# Altium PCB BCK_REVA.PcbDoc (part 2 of 2)
Units mm, origin at the board's own origin, x right, y up, seen from the top; angles counter-clockwise.
Board outline 99.5 x 146.8 mm, 4 copper layers (Top Layer, Plane (MIXED), Plane (GND), Bottom Layer), stack 1.586 mm thick; 27 components, 72 nets, 792 pads, 1035 vias.
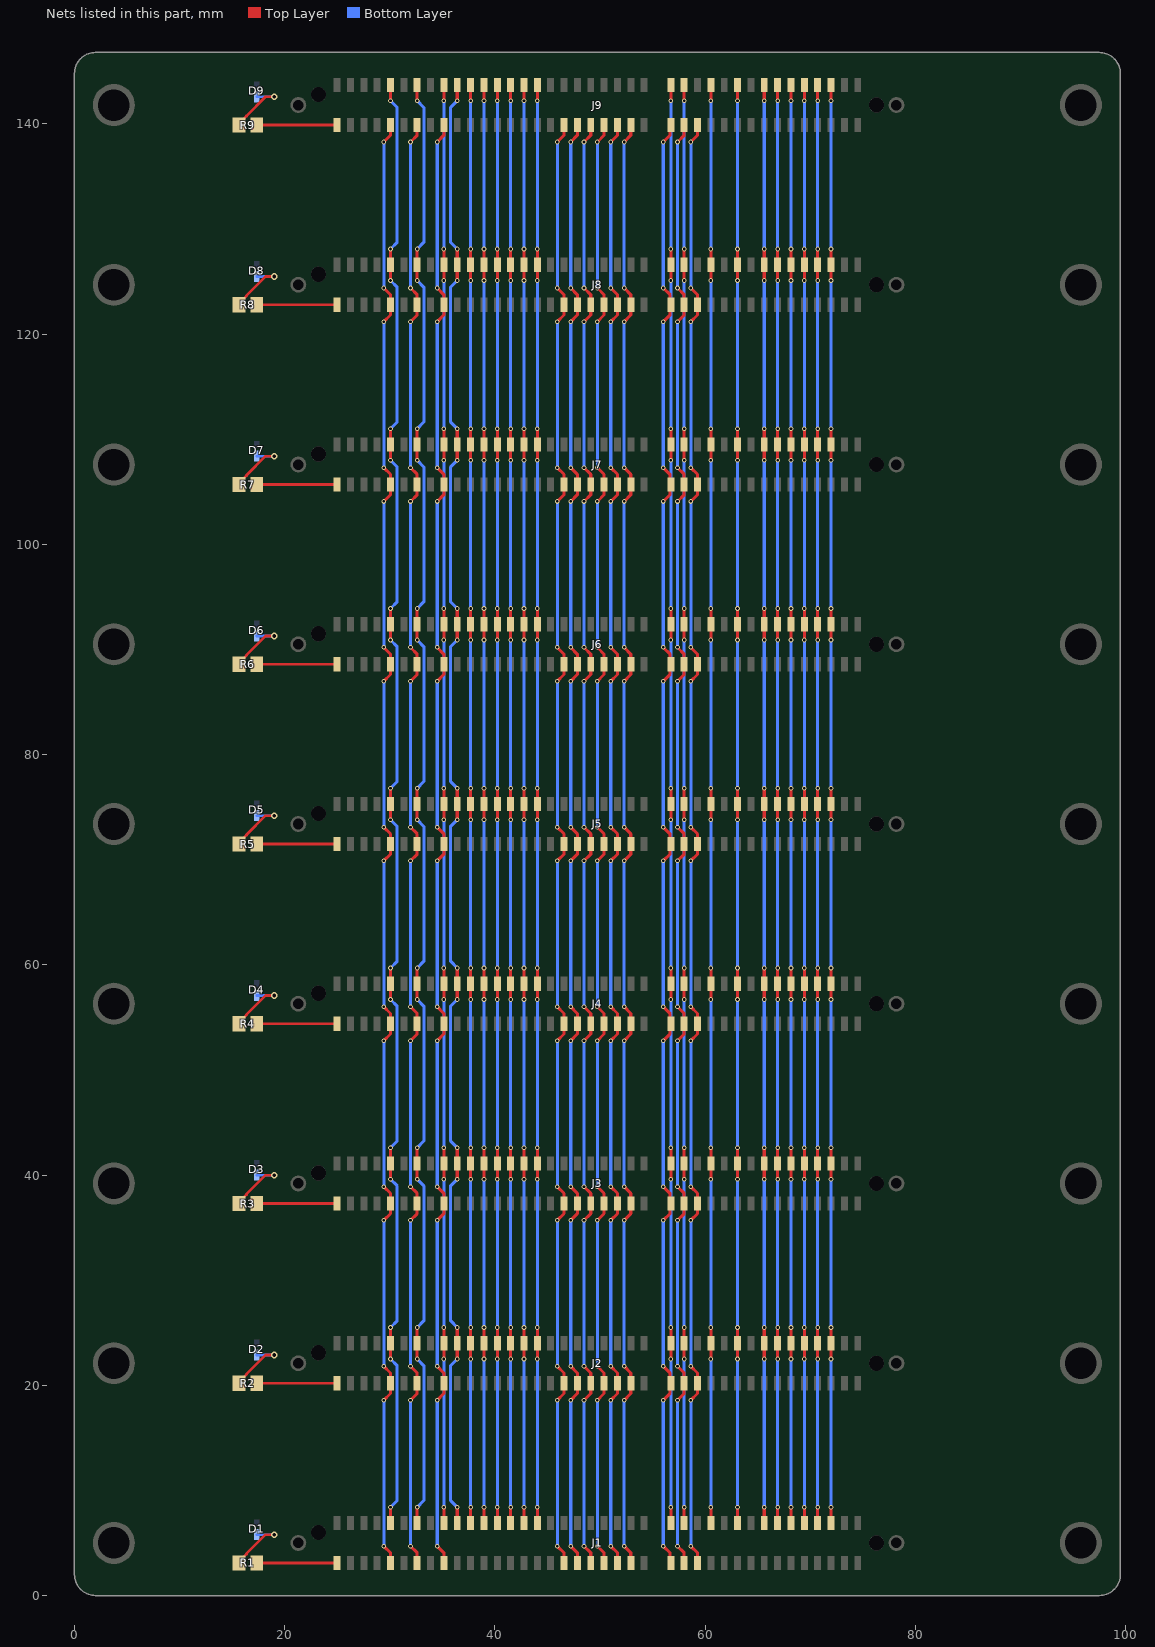
[diagram p4: the nets of this part, all layers, seen from the top]

## Via types
v1: diameter 0.445, hole 0.254, Top Layer to Bottom Layer, 961 vias
v2: diameter 0.635, hole 0.356, Top Layer to Bottom Layer, 56 vias
v3: diameter 0.444, hole 0.254, Top Layer to Bottom Layer, 18 vias

## Nets (pads, with @x,y where several pads share a name; then routed paths per layer and width w, separated by ;. In a path a pad name is that pad's centre, name@x,y a point inside that pad or via, vN(x,y) a via of type N, cw(c..) or ccw(c..) an arc to the next point about the centre after c; other vN are vias at no path point) (continued)
GPIO7: J1.44 J2.44 J3.44 J4.44 J5.44 J6.44 J7.44 J8.44 J9.44 | length 141
  Top Layer w0.293: v1(45.94,4.7) 46.575,4.065 J1.44@46.575,3.095 ; v1(45.94,18.59) 46.575,19.225 J2.44@46.575,20.195 46.575,21.165 v1(45.94,21.8) ; v1(45.94,35.69) 46.575,36.325 46.575,38.265 v1(45.94,38.9) ; v1(45.94,52.79) 46.575,53.425 46.575,55.365 v1(45.94,56) ; v1(45.94,69.89) 46.575,70.525 46.575,72.465 v1(45.94,73.1) ; v1(45.94,86.99) 46.575,87.625 46.575,89.565 v1(45.94,90.2) ; v1(45.94,104.09) 46.575,104.725 46.575,106.665 v1(45.94,107.3) ; v1(45.94,121.19) 46.575,121.825 46.575,123.765 v1(45.94,124.4) ; v1(45.94,138.29) 46.575,138.925 J9.44@46.575,139.895
  Bottom Layer w0.293: v1(45.94,4.7) v1(45.94,18.59) ; v1(45.94,21.8) v1(45.94,35.69) ; v1(45.94,38.9) v1(45.94,52.79) ; v1(45.94,56) v1(45.94,69.89) ; v1(45.94,73.1) v1(45.94,86.99) ; v1(45.94,90.2) v1(45.94,104.09) ; v1(45.94,107.3) v1(45.94,121.19) ; v1(45.94,124.4) v1(45.94,138.29)
GPIO8: J1.42 J2.42 J3.42 J4.42 J5.42 J6.42 J7.42 J8.42 J9.42 | length 141
  Top Layer w0.293: v1(47.21,4.7) 47.845,4.065 J1.42@47.845,3.095 ; v1(47.21,18.59) 47.845,19.225 47.845,21.165 v1(47.21,21.8) ; v1(47.21,35.69) 47.845,36.325 47.845,38.265 v1(47.21,38.9) ; v1(47.21,52.79) 47.845,53.425 47.845,55.365 v1(47.21,56) ; v1(47.21,69.89) 47.845,70.525 47.845,72.465 v1(47.21,73.1) ; v1(47.21,86.99) 47.845,87.625 47.845,89.565 v1(47.21,90.2) ; v1(47.21,104.09) 47.845,104.725 47.845,106.665 v1(47.21,107.3) ; v1(47.21,121.19) 47.845,121.825 47.845,123.765 v1(47.21,124.4) ; v1(47.21,138.29) 47.845,138.925 J9.42@47.845,139.895
  Bottom Layer w0.293: v1(47.21,4.7) v1(47.21,18.59) ; v1(47.21,21.8) v1(47.21,35.69) ; v1(47.21,38.9) v1(47.21,52.79) ; v1(47.21,56) v1(47.21,69.89) ; v1(47.21,73.1) v1(47.21,86.99) ; v1(47.21,90.2) v1(47.21,104.09) ; v1(47.21,107.3) v1(47.21,121.19) ; v1(47.21,124.4) v1(47.21,138.29)
GPIO9: J1.40 J2.40 J3.40 J4.40 J5.40 J6.40 J7.40 J8.40 J9.40 | length 141
  Top Layer w0.293: v1(48.48,4.7) 49.115,4.065 J1.40@49.115,3.095 ; v1(48.48,18.59) 49.115,19.225 49.115,21.165 v1(48.48,21.8) ; v1(48.48,35.69) 49.115,36.325 49.115,38.265 v1(48.48,38.9) ; v1(48.48,52.79) 49.115,53.425 49.115,55.365 v1(48.48,56) ; v1(48.48,69.89) 49.115,70.525 49.115,72.465 v1(48.48,73.1) ; v1(48.48,86.99) 49.115,87.625 49.115,89.565 v1(48.48,90.2) ; v1(48.48,104.09) 49.115,104.725 49.115,106.665 v1(48.48,107.3) ; v1(48.48,121.19) 49.115,121.825 49.115,123.765 v1(48.48,124.4) ; v1(48.48,138.29) 49.115,138.925 J9.40@49.115,139.895
  Bottom Layer w0.293: v1(48.48,4.7) v1(48.48,18.59) ; v1(48.48,21.8) v1(48.48,35.69) ; v1(48.48,38.9) v1(48.48,52.79) ; v1(48.48,56) v1(48.48,69.89) ; v1(48.48,73.1) v1(48.48,86.99) ; v1(48.48,90.2) v1(48.48,104.09) ; v1(48.48,107.3) v1(48.48,121.19) ; v1(48.48,124.4) v1(48.48,138.29)
GPIO10: J1.38 J2.38 J3.38 J4.38 J5.38 J6.38 J7.38 J8.38 J9.38 | length 141
  Top Layer w0.293: v1(49.75,4.7) 50.385,4.065 J1.38@50.385,3.095 ; v1(49.75,18.59) 50.385,19.225 J2.38@50.385,20.195 50.385,21.165 v1(49.75,21.8) ; v1(49.75,35.69) 50.385,36.325 50.385,38.265 v1(49.75,38.9) ; v1(49.75,52.79) 50.385,53.425 50.385,55.365 v1(49.75,56) ; v1(49.75,69.89) 50.385,70.525 50.385,72.465 v1(49.75,73.1) ; v1(49.75,86.99) 50.385,87.625 50.385,89.565 v1(49.75,90.2) ; v1(49.75,104.09) 50.385,104.725 50.385,106.665 v1(49.75,107.3) ; v1(49.75,121.19) 50.385,121.825 50.385,123.765 v1(49.75,124.4) ; v1(49.75,138.29) 50.385,138.925 J9.38@50.385,139.895
  Bottom Layer w0.293: v1(49.75,4.7) v1(49.75,18.59) ; v1(49.75,21.8) v1(49.75,35.69) ; v1(49.75,38.9) v1(49.75,52.79) ; v1(49.75,56) v1(49.75,69.89) ; v1(49.75,73.1) v1(49.75,86.99) ; v1(49.75,90.2) v1(49.75,104.09) ; v1(49.75,107.3) v1(49.75,121.19) ; v1(49.75,124.4) v1(49.75,138.29)
GPIO11: J1.36 J2.36 J3.36 J4.36 J5.36 J6.36 J7.36 J8.36 J9.36 | length 141
  Top Layer w0.293: v1(51.02,4.7) 51.655,4.065 J1.36@51.655,3.095 ; v1(51.02,18.59) 51.655,19.225 J2.36@51.655,20.195 51.655,21.165 v1(51.02,21.8) ; v1(51.02,35.69) 51.655,36.325 51.655,38.265 v1(51.02,38.9) ; v1(51.02,52.79) 51.655,53.425 51.655,55.365 v1(51.02,56) ; v1(51.02,69.89) 51.655,70.525 51.655,72.465 v1(51.02,73.1) ; v1(51.02,86.99) 51.655,87.625 51.655,89.565 v1(51.02,90.2) ; v1(51.02,104.09) 51.655,104.725 51.655,106.665 v1(51.02,107.3) ; v1(51.02,121.19) 51.655,121.825 51.655,123.765 v1(51.02,124.4) ; v1(51.02,138.29) 51.655,138.925 J9.36@51.655,139.895
  Bottom Layer w0.293: v1(51.02,4.7) v1(51.02,18.59) ; v1(51.02,21.8) v1(51.02,35.69) ; v1(51.02,38.9) v1(51.02,52.79) ; v1(51.02,56) v1(51.02,69.89) ; v1(51.02,73.1) v1(51.02,86.99) ; v1(51.02,90.2) v1(51.02,104.09) ; v1(51.02,107.3) v1(51.02,121.19) ; v1(51.02,124.4) v1(51.02,138.29)
GPIO12: J1.34 J2.34 J3.34 J4.34 J5.34 J6.34 J7.34 J8.34 J9.34 | length 141
  Top Layer w0.293: v1(52.29,4.7) 52.925,4.065 J1.34@52.925,3.095 ; v1(52.29,18.59) 52.925,19.225 J2.34@52.925,20.195 52.925,21.165 v1(52.29,21.8) ; v1(52.29,35.69) 52.925,36.325 52.925,38.265 v1(52.29,38.9) ; v1(52.29,52.79) 52.925,53.425 52.925,55.365 v1(52.29,56) ; v1(52.29,69.89) 52.925,70.525 52.925,72.465 v1(52.29,73.1) ; v1(52.29,86.99) 52.925,87.625 52.925,89.565 v1(52.29,90.2) ; v1(52.29,104.09) 52.925,104.725 52.925,106.665 v1(52.29,107.3) ; v1(52.29,121.19) 52.925,121.825 52.925,123.765 v1(52.29,124.4) ; v1(52.29,138.29) 52.925,138.925 J9.34@52.925,139.895
  Bottom Layer w0.293: v1(52.29,4.7) v1(52.29,18.59) ; v1(52.29,21.8) v1(52.29,35.69) ; v1(52.29,38.9) v1(52.29,52.79) ; v1(52.29,56) v1(52.29,69.89) ; v1(52.29,73.1) v1(52.29,86.99) ; v1(52.29,90.2) v1(52.29,104.09) ; v1(52.29,107.3) v1(52.29,121.19) ; v1(52.29,124.4) v1(52.29,138.29)
GPIO13: J1.30 J2.30 J3.30 J4.30 J5.30 J6.30 J7.30 J8.30 J9.30 | length 141.8
  Top Layer w0.293: v1(56.01,4.7) 56.672,4.038 56.672,3.158 J1.30@56.735,3.095 ; v1(56.01,18.59) 56.672,19.252 J2.30@56.672,20.132 ; v1(56.01,21.8) 56.672,21.138 56.672,20.258 J2.30@56.735,20.195 ; v1(56.01,35.69) 56.672,36.352 56.672,37.232 J3.30@56.735,37.295 56.672,37.358 56.672,38.238 v1(56.01,38.9) ; v1(56.01,52.79) 56.672,53.452 56.672,54.332 J4.30@56.735,54.395 56.672,54.458 56.672,55.338 v1(56.01,56) ; v1(56.01,69.89) 56.672,70.552 56.672,71.432 J5.30@56.735,71.495 56.672,71.558 56.672,72.438 v1(56.01,73.1) ; v1(56.01,86.99) 56.672,87.652 56.672,88.532 J6.30@56.735,88.595 56.672,88.658 56.672,89.538 v1(56.01,90.2) ; v1(56.01,104.09) 56.672,104.752 56.672,105.632 J7.30@56.735,105.695 56.672,105.758 56.672,106.638 v1(56.01,107.3) ; v1(56.01,121.19) 56.672,121.852 56.672,122.732 J8.30@56.735,122.795 56.672,122.858 56.672,123.738 v1(56.01,124.4) ; v1(56.01,138.29) 56.672,138.952 56.672,139.832 J9.30@56.735,139.895 J9.30@56.672,139.958 ; J2.30@56.672,20.132 J2.30@56.735,20.195 ; J2.30@56.672,20.132 J2.30@56.735,20.195
  Bottom Layer w0.293: v1(56.01,4.7) v1(56.01,18.59) ; v1(56.01,21.8) v1(56.01,35.69) ; v1(56.01,38.9) v1(56.01,52.79) ; v1(56.01,56) v1(56.01,69.89) ; v1(56.01,73.1) v1(56.01,86.99) ; v1(56.01,90.2) v1(56.01,104.09) ; v1(56.01,107.3) v1(56.01,121.19) ; v1(56.01,124.4) v1(56.01,138.29)
GPIO14: J1.28 J2.28 J3.28 J4.28 J5.28 J6.28 J7.28 J8.28 J9.28 | length 141
  Top Layer w0.293: v1(57.37,4.7) 58.005,4.065 J1.28@58.005,3.095 ; v1(57.37,18.59) 58.005,19.225 J2.28@58.005,20.195 58.005,21.165 v1(57.37,21.8) ; v1(57.37,35.69) 58.005,36.325 58.005,38.265 v1(57.37,38.9) ; v1(57.37,52.79) 58.005,53.425 58.005,55.365 v1(57.37,56) ; v1(57.37,69.89) 58.005,70.525 58.005,72.465 v1(57.37,73.1) ; v1(57.37,86.99) 58.005,87.625 58.005,89.565 v1(57.37,90.2) ; v1(57.37,104.09) 58.005,104.725 58.005,106.665 v1(57.37,107.3) ; v1(57.37,121.19) 58.005,121.825 58.005,123.765 v1(57.37,124.4) ; v1(57.37,138.29) 58.005,138.925 J9.28@58.005,139.895
  Bottom Layer w0.293: v1(57.37,4.7) v1(57.37,18.59) ; v1(57.37,21.8) v1(57.37,35.69) ; v1(57.37,38.9) v1(57.37,52.79) ; v1(57.37,56) v1(57.37,69.89) ; v1(57.37,73.1) v1(57.37,86.99) ; v1(57.37,90.2) v1(57.37,104.09) ; v1(57.37,107.3) v1(57.37,121.19) ; v1(57.37,124.4) v1(57.37,138.29)
GPIO15: J1.26 J2.26 J3.26 J4.26 J5.26 J6.26 J7.26 J8.26 J9.26 | length 141
  Top Layer w0.293: v1(58.64,4.7) 59.275,4.065 J1.26@59.275,3.095 ; v1(58.64,18.59) 59.275,19.225 J2.26@59.275,20.195 59.275,21.165 v1(58.64,21.8) ; v1(58.64,35.69) 59.275,36.325 59.275,38.265 v1(58.64,38.9) ; v1(58.64,52.79) 59.275,53.425 59.275,55.365 v1(58.64,56) ; v1(58.64,69.89) 59.275,70.525 59.275,72.465 v1(58.64,73.1) ; v1(58.64,86.99) 59.275,87.625 59.275,89.565 v1(58.64,90.2) ; v1(58.64,104.09) 59.275,104.725 59.275,106.665 v1(58.64,107.3) ; v1(58.64,121.19) 59.275,121.825 59.275,123.765 v1(58.64,124.4) ; v1(58.64,138.29) 59.275,138.925 J9.26@59.275,139.895
  Bottom Layer w0.293: v1(58.64,4.7) v1(58.64,18.59) ; v1(58.64,21.8) v1(58.64,35.69) ; v1(58.64,38.9) v1(58.64,52.79) ; v1(58.64,56) v1(58.64,69.89) ; v1(58.64,73.1) v1(58.64,86.99) ; v1(58.64,90.2) v1(58.64,104.09) ; v1(58.64,107.3) v1(58.64,121.19) ; v1(58.64,124.4) v1(58.64,138.29)
GPIO22: J1.27 J2.27 J3.27 J4.27 J5.27 J6.27 J7.27 J8.27 J9.27 | length 136.8
  Top Layer w0.293: J1.27@58.005,6.905 v1(58.005,8.405) ; v1(58.005,22.505) J2.27@58.005,24.005 v1(58.005,25.505) ; v1(58.005,39.605) J3.27@58.005,41.105 v1(58.005,42.605) ; v1(58.005,56.705) J4.27@58.005,58.205 v1(58.005,59.705) ; v1(58.005,73.805) J5.27@58.005,75.305 v1(58.005,76.805) ; v1(58.005,90.905) J6.27@58.005,92.405 v1(58.005,93.905) ; v1(58.005,108.005) J7.27@58.005,109.505 v1(58.005,111.005) ; v1(58.005,125.105) J8.27@58.005,126.605 v1(58.005,128.105) ; v1(58.005,142.205) J9.27@58.005,143.705
  Bottom Layer w0.293: v1(58.005,8.405) v1(58.005,22.505) ; v1(58.005,25.505) v1(58.005,39.605) ; v1(58.005,42.605) v1(58.005,56.705) ; v1(58.005,59.705) v1(58.005,73.805) ; v1(58.005,76.805) v1(58.005,90.905) ; v1(58.005,93.905) v1(58.005,108.005) ; v1(58.005,111.005) v1(58.005,125.105) ; v1(58.005,128.105) v1(58.005,142.205)
GPIO23: J1.29 J2.29 J3.29 J4.29 J5.29 J6.29 J7.29 J8.29 J9.29 | length 136.8
  Top Layer w0.293: J1.29@56.735,6.905 v1(56.735,8.405) ; v1(56.735,22.505) J2.29@56.735,24.005 v1(56.735,25.505) ; v1(56.735,39.605) J3.29@56.735,41.105 v1(56.735,42.605) ; v1(56.735,56.705) J4.29@56.735,58.205 v1(56.735,59.705) ; v1(56.735,73.805) J5.29@56.735,75.305 v1(56.735,76.805) ; v1(56.735,90.905) J6.29@56.735,92.405 v1(56.735,93.905) ; v1(56.735,108.005) J7.29@56.735,109.505 v1(56.735,111.005) ; v1(56.735,125.105) J8.29@56.735,126.605 v1(56.735,128.105) ; v1(56.735,142.205) J9.29@56.735,143.705
  Bottom Layer w0.293: v1(56.735,8.405) v1(56.735,22.505) ; v1(56.735,25.505) v1(56.735,39.605) ; v1(56.735,42.605) v1(56.735,56.705) ; v1(56.735,59.705) v1(56.735,73.805) ; v1(56.735,76.805) v1(56.735,90.905) ; v1(56.735,93.905) v1(56.735,108.005) ; v1(56.735,111.005) v1(56.735,125.105) ; v1(56.735,128.105) v1(56.735,142.205)
I2C0_SCL: J1.69 J2.69 J3.69 J4.69 J5.69 J6.69 J7.69 J8.69 J9.69 | length 141
  Top Layer w0.293: J1.69@30.065,6.905 v1(30.065,8.405) ; v1(30.065,22.505) J2.69@30.065,24.005 v1(30.065,25.505) ; v1(30.065,39.605) J3.69@30.065,41.105 v1(30.065,42.605) ; v1(30.065,56.705) J4.69@30.065,58.205 v1(30.065,59.705) ; v1(30.065,73.805) J5.69@30.065,75.305 v1(30.065,76.805) ; v1(30.065,90.905) J6.69@30.065,92.405 v1(30.065,93.905) ; v1(30.065,108.005) J7.69@30.065,109.505 v1(30.065,111.005) ; v1(30.065,125.105) J8.69@30.065,126.605 v1(30.065,128.105) ; v1(30.065,142.205) J9.69@30.065,143.705
  Bottom Layer w0.293: v1(30.065,8.405) 30.7,9.04 30.7,21.87 v1(30.065,22.505) ; v1(30.065,25.505) 30.7,26.14 30.7,38.97 v1(30.065,39.605) ; v1(30.065,42.605) 30.7,43.24 30.7,56.07 v1(30.065,56.705) ; v1(30.065,59.705) 30.7,60.34 30.7,73.17 v1(30.065,73.805) ; v1(30.065,76.805) 30.7,77.44 30.7,90.27 v1(30.065,90.905) ; v1(30.065,93.905) 30.7,94.54 30.7,107.37 v1(30.065,108.005) ; v1(30.065,111.005) 30.7,111.64 30.7,124.47 v1(30.065,125.105) ; v1(30.065,128.105) 30.7,128.74 30.7,141.57 v1(30.065,142.205)
I2C0_SDA: J1.65 J2.65 J3.65 J4.65 J5.65 J6.65 J7.65 J8.65 J9.65 | length 141
  Top Layer w0.293: J1.65@32.605,6.905 v1(32.605,8.405) ; v1(32.605,22.505) J2.65@32.605,24.005 v1(32.605,25.505) ; v1(32.605,39.605) J3.65@32.605,41.105 v1(32.605,42.605) ; v1(32.605,56.705) J4.65@32.605,58.205 v1(32.605,59.705) ; v1(32.605,73.805) J5.65@32.605,75.305 v1(32.605,76.805) ; v1(32.605,90.905) J6.65@32.605,92.405 v1(32.605,93.905) ; v1(32.605,108.005) J7.65@32.605,109.505 v1(32.605,111.005) ; v1(32.605,125.105) J8.65@32.605,126.605 v1(32.605,128.105) ; v1(32.605,142.205) J9.65@32.605,143.705
  Bottom Layer w0.293: v1(32.605,8.405) 33.24,9.04 33.24,21.87 v1(32.605,22.505) ; v1(32.605,25.505) 33.24,26.14 33.24,38.97 v1(32.605,39.605) ; v1(32.605,42.605) 33.24,43.24 33.24,56.07 v1(32.605,56.705) ; v1(32.605,59.705) 33.24,60.34 33.24,73.17 v1(32.605,73.805) ; v1(32.605,76.805) 33.24,77.44 33.24,90.27 v1(32.605,90.905) ; v1(32.605,93.905) 33.24,94.54 33.24,107.37 v1(32.605,108.005) ; v1(32.605,111.005) 33.24,111.64 33.24,124.47 v1(32.605,125.105) ; v1(32.605,128.105) 33.24,128.74 33.24,141.57 v1(32.605,142.205)
I2C1_SCL: J1.23 J2.23 J3.23 J4.23 J5.23 J6.23 J7.23 J8.23 J9.23 | length 136.8
  Top Layer w0.293: J1.23@60.545,6.905 v1(60.545,8.405) ; v1(60.545,22.505) J2.23@60.545,24.005 v1(60.545,25.505) ; v1(60.545,39.605) J3.23@60.545,41.105 v1(60.545,42.605) ; v1(60.545,56.705) J4.23@60.545,58.205 v1(60.545,59.705) ; v1(60.545,73.805) J5.23@60.545,75.305 v1(60.545,76.805) ; v1(60.545,90.905) J6.23@60.545,92.405 v1(60.545,93.905) ; v1(60.545,108.005) J7.23@60.545,109.505 v1(60.545,111.005) ; v1(60.545,125.105) J8.23@60.545,126.605 v1(60.545,128.105) ; v1(60.545,142.205) J9.23@60.545,143.705
  Bottom Layer w0.293: v1(60.545,8.405) v1(60.545,22.505) ; v1(60.545,25.505) v1(60.545,39.605) ; v1(60.545,42.605) v1(60.545,56.705) ; v1(60.545,59.705) v1(60.545,73.805) ; v1(60.545,76.805) v1(60.545,90.905) ; v1(60.545,93.905) v1(60.545,108.005) ; v1(60.545,111.005) v1(60.545,125.105) ; v1(60.545,128.105) v1(60.545,142.205)
I2C1_SDA: J1.19 J2.19 J3.19 J4.19 J5.19 J6.19 J7.19 J8.19 J9.19 | length 136.8
  Top Layer w0.293: J1.19@63.085,6.905 v1(63.085,8.405) ; v1(63.085,22.505) J2.19@63.085,24.005 v1(63.085,25.505) ; v1(63.085,39.605) J3.19@63.085,41.105 v1(63.085,42.605) ; v1(63.085,56.705) J4.19@63.085,58.205 v1(63.085,59.705) ; v1(63.085,73.805) J5.19@63.085,75.305 v1(63.085,76.805) ; v1(63.085,90.905) J6.19@63.085,92.405 v1(63.085,93.905) ; v1(63.085,108.005) J7.19@63.085,109.505 v1(63.085,111.005) ; v1(63.085,125.105) J8.19@63.085,126.605 v1(63.085,128.105) ; v1(63.085,142.205) J9.19@63.085,143.705
  Bottom Layer w0.293: v1(63.085,8.405) v1(63.085,22.505) ; v1(63.085,25.505) v1(63.085,39.605) ; v1(63.085,42.605) v1(63.085,56.705) ; v1(63.085,59.705) v1(63.085,73.805) ; v1(63.085,76.805) v1(63.085,90.905) ; v1(63.085,93.905) v1(63.085,108.005) ; v1(63.085,111.005) v1(63.085,125.105) ; v1(63.085,128.105) v1(63.085,142.205)
NetD1_2: D1.2 R1.2 | length 6.2
  Top Layer w0.254: R1.2@15.65,3.095 15.65,3.22 16.369,3.939 16.369,3.978 18.181,5.79 v2(19,5.79)
  Bottom Layer w0.254: D1.2@17.35,5.79 v2(19,5.79)
  other v2: 19,5.79
NetD2_2: D2.2 R2.2 | length 6.2
  Top Layer w0.254: R2.2@15.65,20.195 15.65,20.32 16.369,21.039 16.369,21.078 18.181,22.89 v2(19,22.89)
  Bottom Layer w0.254: D2.2@17.35,22.89 v2(19,22.89)
NetD3_2: D3.2 R3.2 | length 6.2
  Top Layer w0.254: R3.2@15.65,37.295 15.65,37.42 16.369,38.139 16.369,38.178 18.181,39.99 v2(19,39.99)
  Bottom Layer w0.254: D3.2@17.35,39.99 v2(19,39.99)
NetD4_2: D4.2 R4.2 | length 6.2
  Top Layer w0.254: R4.2@15.65,54.395 15.65,54.52 16.369,55.239 16.369,55.278 18.181,57.09 v2(19,57.09)
  Bottom Layer w0.254: D4.2@17.35,57.09 v2(19,57.09)
NetD5_2: D5.2 R5.2 | length 6.2
  Top Layer w0.254: R5.2@15.65,71.495 15.65,71.62 16.369,72.339 16.369,72.378 18.181,74.19 v2(19,74.19)
  Bottom Layer w0.254: D5.2@17.35,74.19 v2(19,74.19)
NetD6_2: D6.2 R6.2 | length 6.2
  Top Layer w0.254: R6.2@15.65,88.595 15.65,88.72 16.369,89.439 16.369,89.478 18.181,91.29 v2(19,91.29)
  Bottom Layer w0.254: D6.2@17.35,91.29 v2(19,91.29)
NetD7_2: D7.2 R7.2 | length 6.2
  Top Layer w0.254: R7.2@15.65,105.695 15.65,105.82 16.369,106.539 16.369,106.578 18.181,108.39 v2(19,108.39)
  Bottom Layer w0.254: D7.2@17.35,108.39 v2(19,108.39)
NetD8_2: D8.2 R8.2 | length 6.2
  Top Layer w0.254: R8.2@15.65,122.795 15.65,122.92 16.369,123.639 16.369,123.678 18.181,125.49 v2(19,125.49)
  Bottom Layer w0.254: D8.2@17.35,125.49 v2(19,125.49)
NetD9_2: D9.2 R9.2 | length 6.2
  Top Layer w0.254: R9.2@15.65,139.895 15.65,140.02 16.369,140.739 16.369,140.778 18.181,142.59 v2(19,142.59)
  Bottom Layer w0.254: D9.2@17.35,142.59 v2(19,142.59)
PORT0: J1.15 J2.15 J3.15 J4.15 J5.15 J6.15 J7.15 J8.15 J9.15 | length 136.8
  Top Layer w0.293: J1.15@65.625,6.905 v1(65.625,8.405) ; v1(65.625,22.505) J2.15@65.625,24.005 v1(65.625,25.505) ; v1(65.625,39.605) J3.15@65.625,41.105 v1(65.625,42.605) ; v1(65.625,56.705) J4.15@65.625,58.205 v1(65.625,59.705) ; v1(65.625,73.805) J5.15@65.625,75.305 v1(65.625,76.805) ; v1(65.625,90.905) J6.15@65.625,92.405 v1(65.625,93.905) ; v1(65.625,108.005) J7.15@65.625,109.505 v1(65.625,111.005) ; v1(65.625,125.105) J8.15@65.625,126.605 v1(65.625,128.105) ; v1(65.625,142.205) J9.15@65.625,143.705
  Bottom Layer w0.293: v1(65.625,8.405) v1(65.625,22.505) ; v1(65.625,25.505) v1(65.625,39.605) ; v1(65.625,42.605) v1(65.625,56.705) ; v1(65.625,59.705) v1(65.625,73.805) ; v1(65.625,76.805) v1(65.625,90.905) ; v1(65.625,93.905) v1(65.625,108.005) ; v1(65.625,111.005) v1(65.625,125.105) ; v1(65.625,128.105) v1(65.625,142.205)
PORT1: J1.13 J2.13 J3.13 J4.13 J5.13 J6.13 J7.13 J8.13 J9.13 | length 136.8
  Top Layer w0.293: J1.13@66.895,6.905 v1(66.895,8.405) ; v1(66.895,22.505) J2.13@66.895,24.005 v1(66.895,25.505) ; v1(66.895,39.605) J3.13@66.895,41.105 v1(66.895,42.605) ; v1(66.895,56.705) J4.13@66.895,58.205 v1(66.895,59.705) ; v1(66.895,73.805) J5.13@66.895,75.305 v1(66.895,76.805) ; v1(66.895,90.905) J6.13@66.895,92.405 v1(66.895,93.905) ; v1(66.895,108.005) J7.13@66.895,109.505 v1(66.895,111.005) ; v1(66.895,125.105) J8.13@66.895,126.605 v1(66.895,128.105) ; v1(66.895,142.205) J9.13@66.895,143.705
  Bottom Layer w0.293: v1(66.895,8.405) v1(66.895,22.505) ; v1(66.895,25.505) v1(66.895,39.605) ; v1(66.895,42.605) v1(66.895,56.705) ; v1(66.895,59.705) v1(66.895,73.805) ; v1(66.895,76.805) v1(66.895,90.905) ; v1(66.895,93.905) v1(66.895,108.005) ; v1(66.895,111.005) v1(66.895,125.105) ; v1(66.895,128.105) v1(66.895,142.205)
PORT2: J1.11 J2.11 J3.11 J4.11 J5.11 J6.11 J7.11 J8.11 J9.11 | length 136.8
  Top Layer w0.293: J1.11@68.165,6.905 v1(68.165,8.405) ; v1(68.165,22.505) J2.11@68.165,24.005 v1(68.165,25.505) ; v1(68.165,39.605) J3.11@68.165,41.105 v1(68.165,42.605) ; v1(68.165,56.705) J4.11@68.165,58.205 v1(68.165,59.705) ; v1(68.165,73.805) J5.11@68.165,75.305 v1(68.165,76.805) ; v1(68.165,90.905) J6.11@68.165,92.405 v1(68.165,93.905) ; v1(68.165,108.005) J7.11@68.165,109.505 v1(68.165,111.005) ; v1(68.165,125.105) J8.11@68.165,126.605 v1(68.165,128.105) ; v1(68.165,142.205) J9.11@68.165,143.705
  Bottom Layer w0.293: v1(68.165,8.405) v1(68.165,22.505) ; v1(68.165,25.505) v1(68.165,39.605) ; v1(68.165,42.605) v1(68.165,56.705) ; v1(68.165,59.705) v1(68.165,73.805) ; v1(68.165,76.805) v1(68.165,90.905) ; v1(68.165,93.905) v1(68.165,108.005) ; v1(68.165,111.005) v1(68.165,125.105) ; v1(68.165,128.105) v1(68.165,142.205)
PORT3: J1.09 J2.09 J3.09 J4.09 J5.09 J6.09 J7.09 J8.09 J9.09 | length 136.8
  Top Layer w0.293: J1.09@69.435,6.905 v1(69.435,8.405) ; v1(69.435,22.505) J2.09@69.435,24.005 v1(69.435,25.505) ; v1(69.435,39.605) J3.09@69.435,41.105 v1(69.435,42.605) ; v1(69.435,56.705) J4.09@69.435,58.205 v1(69.435,59.705) ; v1(69.435,73.805) J5.09@69.435,75.305 v1(69.435,76.805) ; v1(69.435,90.905) J6.09@69.435,92.405 v1(69.435,93.905) ; v1(69.435,108.005) J7.09@69.435,109.505 v1(69.435,111.005) ; v1(69.435,125.105) J8.09@69.435,126.605 v1(69.435,128.105) ; v1(69.435,142.205) J9.09@69.435,143.705
  Bottom Layer w0.293: v1(69.435,8.405) v1(69.435,22.505) ; v1(69.435,25.505) v1(69.435,39.605) ; v1(69.435,42.605) v1(69.435,56.705) ; v1(69.435,59.705) v1(69.435,73.805) ; v1(69.435,76.805) v1(69.435,90.905) ; v1(69.435,93.905) v1(69.435,108.005) ; v1(69.435,111.005) v1(69.435,125.105) ; v1(69.435,128.105) v1(69.435,142.205)
PORT4: J1.07 J2.07 J3.07 J4.07 J5.07 J6.07 J7.07 J8.07 J9.07 | length 136.8
  Top Layer w0.293: J1.07@70.705,6.905 v1(70.705,8.405) ; v1(70.705,22.505) J2.07@70.705,24.005 v1(70.705,25.505) ; v1(70.705,39.605) J3.07@70.705,41.105 v1(70.705,42.605) ; v1(70.705,56.705) J4.07@70.705,58.205 v1(70.705,59.705) ; v1(70.705,73.805) J5.07@70.705,75.305 v1(70.705,76.805) ; v1(70.705,90.905) J6.07@70.705,92.405 v1(70.705,93.905) ; v1(70.705,108.005) J7.07@70.705,109.505 v1(70.705,111.005) ; v1(70.705,125.105) J8.07@70.705,126.605 v1(70.705,128.105) ; v1(70.705,142.205) J9.07@70.705,143.705
  Bottom Layer w0.293: v1(70.705,8.405) v1(70.705,22.505) ; v1(70.705,25.505) v1(70.705,39.605) ; v1(70.705,42.605) v1(70.705,56.705) ; v1(70.705,59.705) v1(70.705,73.805) ; v1(70.705,76.805) v1(70.705,90.905) ; v1(70.705,93.905) v1(70.705,108.005) ; v1(70.705,111.005) v1(70.705,125.105) ; v1(70.705,128.105) v1(70.705,142.205)
PORT5: J1.05 J2.05 J3.05 J4.05 J5.05 J6.05 J7.05 J8.05 J9.05 | length 136.8
  Top Layer w0.293: J1.05@71.975,6.905 v1(71.975,8.405) ; v1(71.975,22.505) J2.05@71.975,24.005 v1(71.975,25.505) ; v1(71.975,39.605) J3.05@71.975,41.105 v1(71.975,42.605) ; v1(71.975,56.705) J4.05@71.975,58.205 v1(71.975,59.705) ; v1(71.975,73.805) J5.05@71.975,75.305 v1(71.975,76.805) ; v1(71.975,90.905) J6.05@71.975,92.405 v1(71.975,93.905) ; v1(71.975,108.005) J7.05@71.975,109.505 v1(71.975,111.005) ; v1(71.975,125.105) J8.05@71.975,126.605 v1(71.975,128.105) ; v1(71.975,142.205) J9.05@71.975,143.705
  Bottom Layer w0.293: v1(71.975,8.405) v1(71.975,22.505) ; v1(71.975,25.505) v1(71.975,39.605) ; v1(71.975,42.605) v1(71.975,56.705) ; v1(71.975,59.705) v1(71.975,73.805) ; v1(71.975,76.805) v1(71.975,90.905) ; v1(71.975,93.905) v1(71.975,108.005) ; v1(71.975,111.005) v1(71.975,125.105) ; v1(71.975,128.105) v1(71.975,142.205)
SLOT1LED: J1.78 R1.1 | length 7.6
  Top Layer w0.254: R1.1@17.35,3.095 J1.78@24.985,3.095
SLOT2LED: J2.78 R2.1 | length 7.6
  Top Layer w0.254: R2.1@17.35,20.195 J2.78@24.985,20.195
SLOT3LED: J3.78 R3.1 | length 7.6
  Top Layer w0.254: R3.1@17.35,37.295 J3.78@24.985,37.295
SLOT4LED: J4.78 R4.1 | length 7.6
  Top Layer w0.254: R4.1@17.35,54.395 J4.78@24.985,54.395
SLOT5LED: J5.78 R5.1 | length 7.6
  Top Layer w0.254: R5.1@17.35,71.495 J5.78@24.985,71.495
SLOT6LED: J6.78 R6.1 | length 7.6
  Top Layer w0.254: R6.1@17.35,88.595 J6.78@24.985,88.595
SLOT7LED: J7.78 R7.1 | length 7.6
  Top Layer w0.254: R7.1@17.35,105.695 J7.78@24.985,105.695
SLOT8LED: J8.78 R8.1 | length 7.6
  Top Layer w0.254: R8.1@17.35,122.795 J8.78@24.985,122.795
SLOT9LED: J9.78 R9.1 | length 7.6
  Top Layer w0.254: R9.1@17.35,139.895 J9.78@24.985,139.895
SPI_MISO: J1.62 J2.62 J3.62 J4.62 J5.62 J6.62 J7.62 J8.62 J9.62 | length 141
  Top Layer w0.293: v1(34.51,4.7) 35.145,4.065 J1.62@35.145,3.095 ; v1(34.51,18.59) 35.145,19.225 J2.62@35.145,20.195 35.145,21.165 v1(34.51,21.8) ; v1(34.51,35.69) 35.145,36.325 35.145,38.265 v1(34.51,38.9) ; v1(34.51,52.79) 35.145,53.425 35.145,55.365 v1(34.51,56) ; v1(34.51,69.89) 35.145,70.525 35.145,72.465 v1(34.51,73.1) ; v1(34.51,86.99) 35.145,87.625 35.145,89.565 v1(34.51,90.2) ; v1(34.51,104.09) 35.145,104.725 35.145,106.665 v1(34.51,107.3) ; v1(34.51,121.19) 35.145,121.825 35.145,123.765 v1(34.51,124.4) ; v1(34.51,138.29) 35.145,138.925 J9.62@35.145,139.895
  Bottom Layer w0.293: v1(34.51,4.7) v1(34.51,18.59) ; v1(34.51,21.8) v1(34.51,35.69) ; v1(34.51,38.9) v1(34.51,52.79) ; v1(34.51,56) v1(34.51,69.89) ; v1(34.51,73.1) v1(34.51,86.99) ; v1(34.51,90.2) v1(34.51,104.09) ; v1(34.51,107.3) v1(34.51,121.19) ; v1(34.51,124.4) v1(34.51,138.29)
SPI_MOSI: J1.66 J2.66 J3.66 J4.66 J5.66 J6.66 J7.66 J8.66 J9.66 | length 141
  Top Layer w0.293: v1(31.97,4.7) 32.605,4.065 J1.66@32.605,3.095 ; v1(31.97,18.59) 32.605,19.225 J2.66@32.605,20.195 32.605,21.165 v1(31.97,21.8) ; v1(31.97,35.69) 32.605,36.325 32.605,38.265 v1(31.97,38.9) ; v1(31.97,52.79) 32.605,53.425 32.605,55.365 v1(31.97,56) ; v1(31.97,69.89) 32.605,70.525 32.605,72.465 v1(31.97,73.1) ; v1(31.97,86.99) 32.605,87.625 32.605,89.565 v1(31.97,90.2) ; v1(31.97,104.09) 32.605,104.725 32.605,106.665 v1(31.97,107.3) ; v1(31.97,121.19) 32.605,121.825 32.605,123.765 v1(31.97,124.4) ; v1(31.97,138.29) 32.605,138.925 J9.66@32.605,139.895
  Bottom Layer w0.293: v1(31.97,4.7) v1(31.97,18.59) ; v1(31.97,21.8) v1(31.97,35.69) ; v1(31.97,38.9) v1(31.97,52.79) ; v1(31.97,56) v1(31.97,69.89) ; v1(31.97,73.1) v1(31.97,86.99) ; v1(31.97,90.2) v1(31.97,104.09) ; v1(31.97,107.3) v1(31.97,121.19) ; v1(31.97,124.4) v1(31.97,138.29)
SPI_SCK: J1.70 J2.70 J3.70 J4.70 J5.70 J6.70 J7.70 J8.70 J9.70 | length 141
  Top Layer w0.293: v1(29.43,4.7) 30.065,4.065 J1.70@30.065,3.095 ; v1(29.43,18.59) 30.065,19.225 J2.70@30.065,20.195 30.065,21.165 v1(29.43,21.8) ; v1(29.43,35.69) 30.065,36.325 30.065,38.265 v1(29.43,38.9) ; v1(29.43,52.79) 30.065,53.425 30.065,55.365 v1(29.43,56) ; v1(29.43,69.89) 30.065,70.525 30.065,72.465 v1(29.43,73.1) ; v1(29.43,86.99) 30.065,87.625 30.065,89.565 v1(29.43,90.2) ; v1(29.43,104.09) 30.065,104.725 30.065,106.665 v1(29.43,107.3) ; v1(29.43,121.19) 30.065,121.825 30.065,123.765 v1(29.43,124.4) ; v1(29.43,138.29) 30.065,138.925 J9.70@30.065,139.895
  Bottom Layer w0.293: v1(29.43,4.7) v1(29.43,18.59) ; v1(29.43,21.8) v1(29.43,35.69) ; v1(29.43,38.9) v1(29.43,52.79) ; v1(29.43,56) v1(29.43,69.89) ; v1(29.43,73.1) v1(29.43,86.99) ; v1(29.43,90.2) v1(29.43,104.09) ; v1(29.43,107.3) v1(29.43,121.19) ; v1(29.43,124.4) v1(29.43,138.29)
  other v1: 29.43,21.8
UART0_RX: J1.61 J2.61 J3.61 J4.61 J5.61 J6.61 J7.61 J8.61 J9.61 | length 136.8
  Top Layer w0.293: J1.61@35.145,6.905 v1(35.145,8.405) ; v1(35.145,22.505) v1(35.145,25.505) ; v1(35.145,39.605) v1(35.145,42.605) ; v1(35.145,56.705) v1(35.145,59.705) ; v1(35.145,73.805) v1(35.145,76.805) ; v1(35.145,90.905) v1(35.145,93.905) ; v1(35.145,108.005) v1(35.145,111.005) ; v1(35.145,125.105) v1(35.145,128.105) ; v1(35.145,142.205) J9.61@35.145,143.705
  Bottom Layer w0.293: v1(35.145,8.405) v1(35.145,22.505) ; v1(35.145,25.505) v1(35.145,39.605) ; v1(35.145,42.605) v1(35.145,56.705) ; v1(35.145,59.705) v1(35.145,73.805) ; v1(35.145,76.805) v1(35.145,90.905) ; v1(35.145,93.905) v1(35.145,108.005) ; v1(35.145,111.005) v1(35.145,125.105) ; v1(35.145,128.105) v1(35.145,142.205)
UART0_TX: J1.59 J2.59 J3.59 J4.59 J5.59 J6.59 J7.59 J8.59 J9.59 | length 140.9
  Top Layer w0.293: J1.59@36.415,6.905 v1(36.415,8.405) ; v1(36.415,22.505) J2.59@36.415,24.005 v1(36.415,25.505) ; v1(36.415,39.605) J3.59@36.415,41.105 v1(36.415,42.605) ; v1(36.415,56.705) J4.59@36.415,58.205 v1(36.415,59.705) ; v1(36.415,73.805) J5.59@36.415,75.305 v1(36.415,76.805) ; v1(36.415,90.905) J6.59@36.415,92.405 v1(36.415,93.905) ; v1(36.415,108.005) J7.59@36.415,109.505 v1(36.415,111.005) ; v1(36.415,125.105) J8.59@36.415,126.605 v1(36.415,128.105) ; v1(36.415,142.205) J9.59@36.415,143.705
  Bottom Layer w0.293: v1(36.415,8.405) 35.792,9.028 35.792,21.882 v1(36.415,22.505) ; v1(36.415,25.505) 35.792,26.128 35.792,38.982 v1(36.415,39.605) ; v1(36.415,42.605) 35.792,43.228 35.792,56.082 v1(36.415,56.705) ; v1(36.415,59.705) 35.792,60.328 35.792,73.182 v1(36.415,73.805) ; v1(36.415,76.805) 35.792,77.428 35.792,90.282 v1(36.415,90.905) ; v1(36.415,93.905) 35.792,94.528 35.792,107.382 v1(36.415,108.005) ; v1(36.415,111.005) 35.792,111.628 35.792,124.482 v1(36.415,125.105) ; v1(36.415,128.105) 35.792,128.728 35.792,141.582 v1(36.415,142.205)
UART1_RX: J1.57 J2.57 J3.57 J4.57 J5.57 J6.57 J7.57 J8.57 J9.57 | length 136.8
  Top Layer w0.293: J1.57@37.685,6.905 v1(37.685,8.405) ; v1(37.685,22.505) J2.57@37.685,24.005 v1(37.685,25.505) ; v1(37.685,39.605) J3.57@37.685,41.105 v1(37.685,42.605) ; v1(37.685,56.705) J4.57@37.685,58.205 v1(37.685,59.705) ; v1(37.685,73.805) J5.57@37.685,75.305 v1(37.685,76.805) ; v1(37.685,90.905) J6.57@37.685,92.405 v1(37.685,93.905) ; v1(37.685,108.005) J7.57@37.685,109.505 v1(37.685,111.005) ; v1(37.685,125.105) J8.57@37.685,126.605 v1(37.685,128.105) ; v1(37.685,142.205) J9.57@37.685,143.705
  Bottom Layer w0.293: v1(37.685,8.405) v1(37.685,22.505) ; v1(37.685,25.505) v1(37.685,39.605) ; v1(37.685,42.605) v1(37.685,56.705) ; v1(37.685,59.705) v1(37.685,73.805) ; v1(37.685,76.805) v1(37.685,90.905) ; v1(37.685,93.905) v1(37.685,108.005) ; v1(37.685,111.005) v1(37.685,125.105) ; v1(37.685,128.105) v1(37.685,142.205)
UART1_TX: J1.55 J2.55 J3.55 J4.55 J5.55 J6.55 J7.55 J8.55 J9.55 | length 136.8
  Top Layer w0.293: J1.55@38.955,6.905 v1(38.955,8.405) ; v1(38.955,22.505) J2.55@38.955,24.005 v1(38.955,25.505) ; v1(38.955,39.605) J3.55@38.955,41.105 v1(38.955,42.605) ; v1(38.955,56.705) J4.55@38.955,58.205 v1(38.955,59.705) ; v1(38.955,73.805) J5.55@38.955,75.305 v1(38.955,76.805) ; v1(38.955,90.905) J6.55@38.955,92.405 v1(38.955,93.905) ; v1(38.955,108.005) J7.55@38.955,109.505 v1(38.955,111.005) ; v1(38.955,125.105) J8.55@38.955,126.605 v1(38.955,128.105) ; v1(38.955,142.205) J9.55@38.955,143.705
  Bottom Layer w0.293: v1(38.955,8.405) v1(38.955,22.505) ; v1(38.955,25.505) v1(38.955,39.605) ; v1(38.955,42.605) v1(38.955,56.705) ; v1(38.955,59.705) v1(38.955,73.805) ; v1(38.955,76.805) v1(38.955,90.905) ; v1(38.955,93.905) v1(38.955,108.005) ; v1(38.955,111.005) v1(38.955,125.105) ; v1(38.955,128.105) v1(38.955,142.205)
UART2_RX: J1.53 J2.53 J3.53 J4.53 J5.53 J6.53 J7.53 J8.53 J9.53 | length 136.8
  Top Layer w0.293: J1.53@40.225,6.905 v1(40.225,8.405) ; v1(40.225,22.505) J2.53@40.225,24.005 v1(40.225,25.505) ; v1(40.225,39.605) J3.53@40.225,41.105 v1(40.225,42.605) ; v1(40.225,56.705) J4.53@40.225,58.205 v1(40.225,59.705) ; v1(40.225,73.805) J5.53@40.225,75.305 v1(40.225,76.805) ; v1(40.225,90.905) J6.53@40.225,92.405 v1(40.225,93.905) ; v1(40.225,108.005) J7.53@40.225,109.505 v1(40.225,111.005) ; v1(40.225,125.105) J8.53@40.225,126.605 v1(40.225,128.105) ; v1(40.225,142.205) J9.53@40.225,143.705
  Bottom Layer w0.293: v1(40.225,8.405) v1(40.225,22.505) ; v1(40.225,25.505) v1(40.225,39.605) ; v1(40.225,42.605) v1(40.225,56.705) ; v1(40.225,59.705) v1(40.225,73.805) ; v1(40.225,76.805) v1(40.225,90.905) ; v1(40.225,93.905) v1(40.225,108.005) ; v1(40.225,111.005) v1(40.225,125.105) ; v1(40.225,128.105) v1(40.225,142.205)
UART2_TX: J1.51 J2.51 J3.51 J4.51 J5.51 J6.51 J7.51 J8.51 J9.51 | length 136.8
  Top Layer w0.293: J1.51@41.495,6.905 v1(41.495,8.405) ; v1(41.495,22.505) J2.51@41.495,24.005 v1(41.495,25.505) ; v1(41.495,39.605) J3.51@41.495,41.105 v1(41.495,42.605) ; v1(41.495,56.705) J4.51@41.495,58.205 v1(41.495,59.705) ; v1(41.495,73.805) J5.51@41.495,75.305 v1(41.495,76.805) ; v1(41.495,90.905) J6.51@41.495,92.405 v1(41.495,93.905) ; v1(41.495,108.005) J7.51@41.495,109.505 v1(41.495,111.005) ; v1(41.495,125.105) J8.51@41.495,126.605 v1(41.495,128.105) ; v1(41.495,142.205) J9.51@41.495,143.705
  Bottom Layer w0.293: v1(41.495,8.405) v1(41.495,22.505) ; v1(41.495,25.505) v1(41.495,39.605) ; v1(41.495,42.605) v1(41.495,56.705) ; v1(41.495,59.705) v1(41.495,73.805) ; v1(41.495,76.805) v1(41.495,90.905) ; v1(41.495,93.905) v1(41.495,108.005) ; v1(41.495,111.005) v1(41.495,125.105) ; v1(41.495,128.105) v1(41.495,142.205)
UART3_RX: J1.49 J2.49 J3.49 J4.49 J5.49 J6.49 J7.49 J8.49 J9.49 | length 136.8
  Top Layer w0.293: J1.49@42.765,6.905 v1(42.765,8.405) ; v1(42.765,22.505) J2.49@42.765,24.005 v1(42.765,25.505) ; v1(42.765,39.605) J3.49@42.765,41.105 v1(42.765,42.605) ; v1(42.765,56.705) J4.49@42.765,58.205 v1(42.765,59.705) ; v1(42.765,73.805) J5.49@42.765,75.305 v1(42.765,76.805) ; v1(42.765,90.905) J6.49@42.765,92.405 v1(42.765,93.905) ; v1(42.765,108.005) J7.49@42.765,109.505 v1(42.765,111.005) ; v1(42.765,125.105) J8.49@42.765,126.605 v1(42.765,128.105) ; v1(42.765,142.205) J9.49@42.765,143.705
  Bottom Layer w0.293: v1(42.765,8.405) v1(42.765,22.505) ; v1(42.765,25.505) v1(42.765,39.605) ; v1(42.765,42.605) v1(42.765,56.705) ; v1(42.765,59.705) v1(42.765,73.805) ; v1(42.765,76.805) v1(42.765,90.905) ; v1(42.765,93.905) v1(42.765,108.005) ; v1(42.765,111.005) v1(42.765,125.105) ; v1(42.765,128.105) v1(42.765,142.205)
UART3_TX: J1.47 J2.47 J3.47 J4.47 J5.47 J6.47 J7.47 J8.47 J9.47 | length 136.8
  Top Layer w0.293: J1.47@44.035,6.905 v1(44.035,8.405) ; v1(44.035,22.505) J2.47@44.035,24.005 v1(44.035,25.505) ; v1(44.035,39.605) v1(44.035,42.605) ; v1(44.035,56.705) v1(44.035,59.705) ; v1(44.035,73.805) v1(44.035,76.805) ; v1(44.035,90.905) v1(44.035,93.905) ; v1(44.035,108.005) v1(44.035,111.005) ; v1(44.035,125.105) v1(44.035,128.105) ; v1(44.035,142.205) J9.47@44.035,143.705
  Bottom Layer w0.293: v1(44.035,8.405) v1(44.035,22.505) ; v1(44.035,25.505) v1(44.035,39.605) ; v1(44.035,42.605) v1(44.035,56.705) ; v1(44.035,59.705) v1(44.035,73.805) ; v1(44.035,76.805) v1(44.035,90.905) ; v1(44.035,93.905) v1(44.035,108.005) ; v1(44.035,111.005) v1(44.035,125.105) ; v1(44.035,128.105) v1(44.035,142.205)
pads on no net: J1. J1.S1 J1.S2 J2. J2.S1 J2.S2 J3. J3.S1 J3.S2 J4. J4.S1 J4.S2 J5. J5.S1 J5.S2 J6. J6.S1 J6.S2 J7. J7.S1 J7.S2 J8. J8.S1 J8.S2 J9. J9.S1 J9.S2

## Polygon pours and split planes (outlines as drawn)
GND on Plane (GND) "GND_L03_P000" (solid, remove dead copper, pour order 0): 0,0 99.5,0 99.5,146.8 0,146.8
+5V on Plane (MIXED) "+5V_L02_P004" (solid, remove dead copper, pour order 4): 73.9,0 79.4,0 79.4,146.8 73.9,146.8
+3.3V on Plane (MIXED) "+3.3V_L02_P001" (solid, remove dead copper, pour order 1): 20.28,0 73.9,0 73.9,146.8 20.28,146.8

## Other copper
Multi-Layer:
  the board outline again, w0.254

## Silkscreen, mask and mechanical layers (free items; w line width, h text height)
Top Overlay:
  text "SLOT 9" at 80.074,141.292 h1.52
  text "SLOT 8" at 80.074,124.192 h1.52
  text "SLOT 7" at 80.074,107.092 h1.52
  text "SLOT 6" at 80.074,89.992 h1.52
  text "SLOT 5" at 80.074,72.892 h1.52
  text "SLOT 4" at 80.074,55.792 h1.52
  text "SLOT 3" at 80.074,38.692 h1.52
  text "SLOT 2" at 80.074,21.592 h1.52
  text "SLOT 1" at 80.074,4.492 h1.52
Bottom Overlay:
  drawing of 64 lines, arcs and shapes, not listed
  text "SLOT9" at 16.406,145.866 h1.52 r90
  text "BCK    REVA" at 65.745,142.98 h3
  text "SLOT8" at 16.406,128.766 h1.52 r90
  text "SLOT7" at 16.406,111.666 h1.52 r90
  text "SLOT6" at 16.406,94.566 h1.52 r90
  text "SLOT5" at 16.406,77.466 h1.52 r90
  text "SLOT4" at 16.406,60.366 h1.52 r90
  text "SLOT3" at 16.406,43.266 h1.52 r90
  text "SLOT2" at 16.406,26.166 h1.52 r90
  text "SLOT1" at 16.406,9.066 h1.52 r90
  text "DARWIN JULL 2022" at 72.992,0.808 h3